# Altium PCB Stm8_PCB.PcbDoc
Units mm, origin at the board's own origin, x right, y up, seen from the top; angles counter-clockwise.
Board outline 64.39 x 38.48 mm, 2 copper layers (Top Layer, Bottom Layer); 55 components, 34 nets, 194 pads, 29 vias.
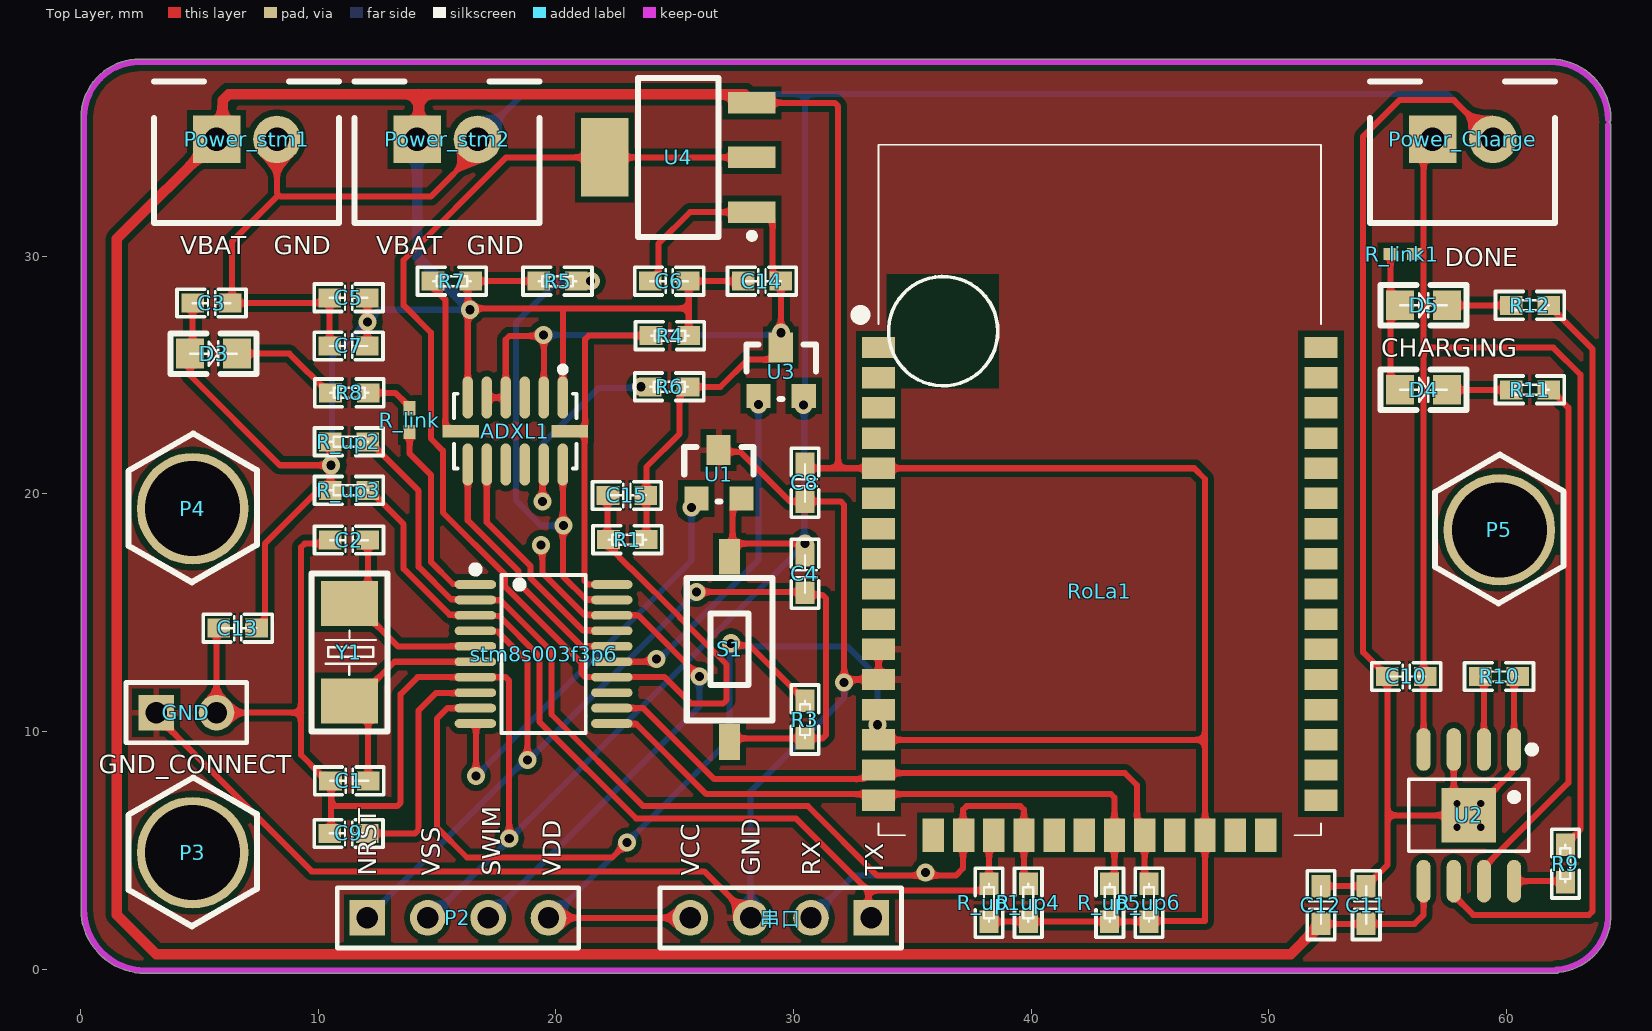
[diagram p0: Top Layer view]
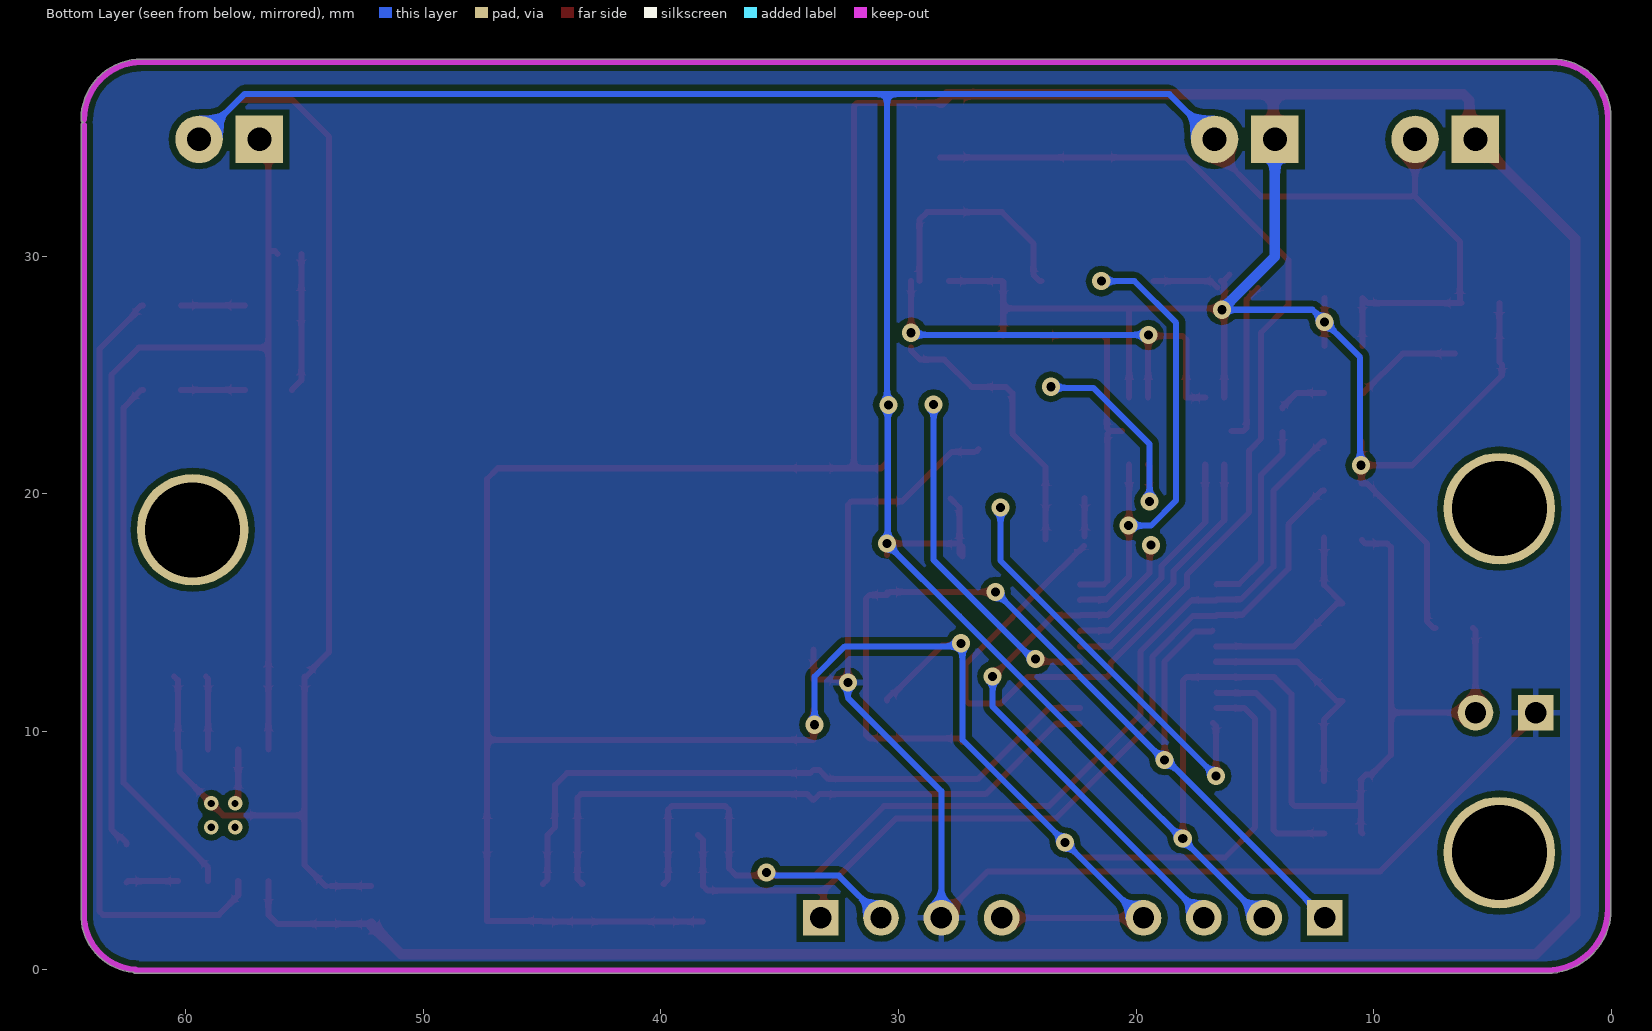
[diagram p1: Bottom Layer view, seen from below]
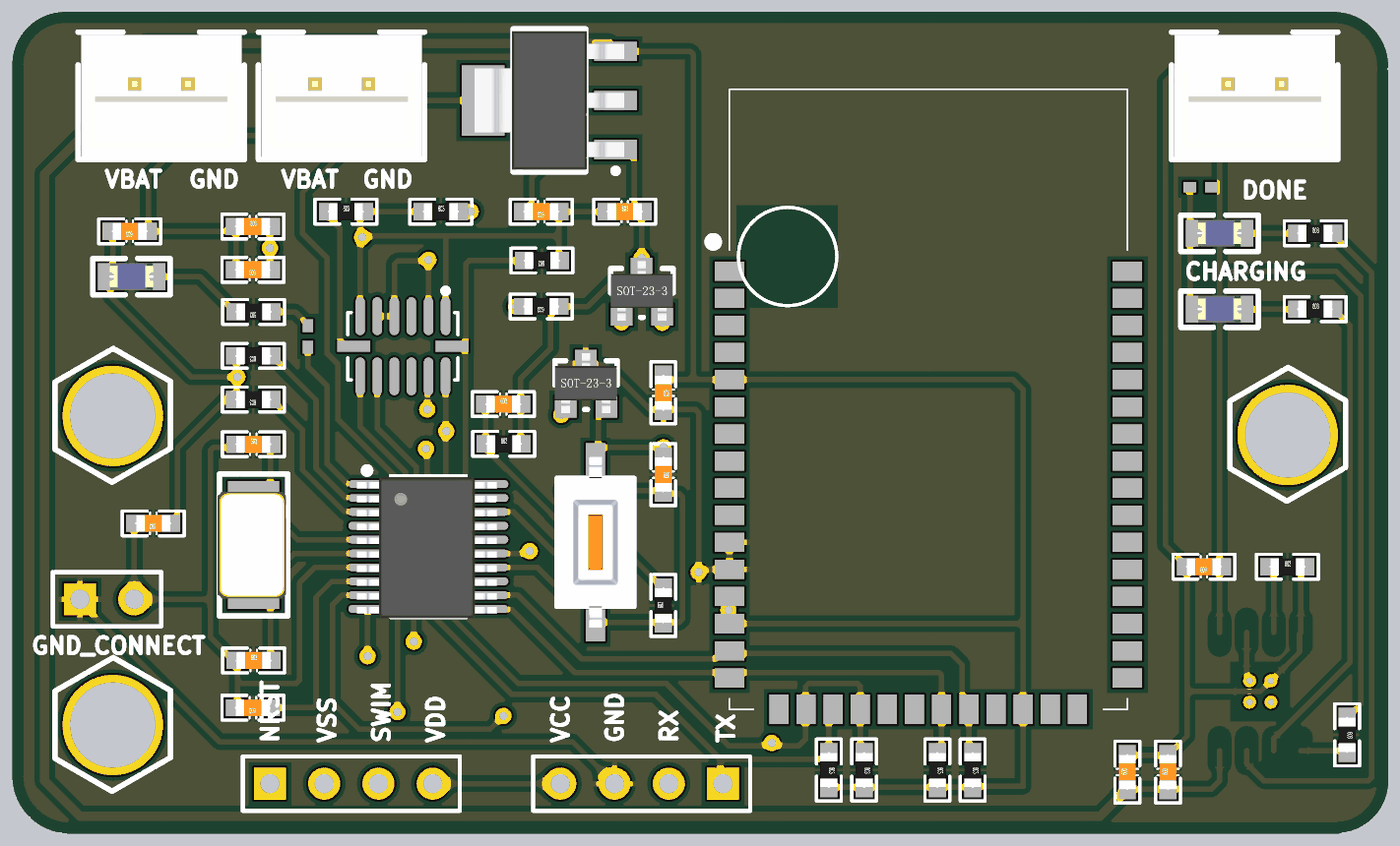
[diagram p2: 3D render of the assembled board from above, using the file's embedded part models]

## Layer stack, top to bottom
Top Solder: solder mask 0.0102, Solder Resist, Dk 3.5
Top Layer: signal copper 0.0356
Dielectric 1: dielectric 0.32, FR-4, Dk 4.8
Bottom Layer: signal copper 0.0356
Bottom Solder: solder mask 0.0102, Solder Resist, Dk 3.5

## Board outline
0.012,2.527 ccw(c2.716,2.527) 2.716,-0.177 62.104,-0.177 ccw(c62.104,-0.049) 62.2,-0.133 ccw(c61.976,2.286) 64.401,2.151 ccw(c64.274,2.158) 64.402,2.158 64.402,2.406 ccw(c64.275,2.406) 64.402,2.406 ccw(c64.275,2.406) 64.402,2.416 64.402,35.517 ccw(c64.274,35.517) 64.305,35.641 ccw(c64.275,35.765) 64.402,35.765 ccw(c64.275,35.765) 64.402,35.765 ccw(c61.855,35.758) 61.849,38.305 ccw(c61.855,35.758) 61.849,38.305 2.481,38.305 ccw(c2.481,35.836) 0.012,35.836

## Design rules (kind name [scope] priority, off if disabled: settings)
Clearance [All] p1: gap=0.254 ignorepadtopadclearanceinfootprint=FALSE except(0: Arc-Hole Track-Hole SMDPad-Hole THPad-Hole Via-Hole Fill-Hole Poly-Hole Region-Hole Text-Hole)
PolygonConnect [All] p1: connectstyle=Relief reliefconductorwidth=0.254 reliefentries=4 polygonreliefangle="90 Angle" airgapwidth=0.254
RoutingVias [All] p1: holewidth=0.711 width=1.27 viastyle="Through Hole" minholewidth=0.711 minwidth=1.27 maxholewidth=0.711 maxwidth=1.27
SolderMaskExpansion [All] p1: expansion=0.102 istentingtop=FALSE
Width [All] p1: maxlimit=0.54 minlimit=0.254 preferedwidth=0.254
30 further rules are at their usual default settings.

## Components (designator, comment, footprint, x,y, rotation, side; value= is the part's Value field where it differs from the comment)
ADXL1 "ADXL345BCCZ" "LGA-14_L5.0-W3.0-P0.80-BL - duplicate" 18.288,22.86 r180 top
C1 "22pf" 0603-C 11.303,7.928 r0 top value=22
C2 "22pf" 0603-C 11.292,18.058 r0 top value=22
C3 "2.2uf" 0603-C 5.504,28.034 r180 top
C4 "0.1uf" 0603-C 30.48,16.637 r270 top value=0.1uF
C5 "2.2uf" 0603-C 11.271,28.257 r0 top
C6 "2.2uf" 0603-C 24.765,28.956 r180 top
C7 "2.2uf" 0603-C 11.271,26.23 r180 top
C8 "2.2uf" 0603-C 30.48,20.469 r270 top
C9 "0.1uf" 0603-C 11.271,5.715 r180 top value=0.1uF
C10 "2.2uf" 0603-C 55.785,12.319 r180 top value=0.1uf
C11 "2.2uf" 0603-C 54.102,2.699 r90 top value=0.1uf
C12 "2.2uf" 0603-C 52.197,2.699 r90 top value=0.1uf
C13 "2.2uf" 0603-C 6.604,14.351 r180 top
C14 "2.2uf" 0603-C 28.67,28.956 r0 top
C15 "2.2uf" 0603-C 22.987,19.939 r0 top value=0.1uf
D3 "LED0" LED-BLUE-0805 5.588,25.908 r0 top
D4 "LED0" LED-BLUE-0805 56.515,24.384 r0 top
D5 "LED0" LED-BLUE-0805 56.515,27.94 r0 top
GND "XH接线座-2P" HDR1X2 3.175,10.795 r0 top
P2 "Header 4" HDR1X4 12.065,2.159 r0 top
P3 "铜柱孔" 铜柱孔 4.712,4.904 r90 top
P4 "铜柱孔" 铜柱孔 4.712,19.382 r90 top
P5 "铜柱孔" 铜柱孔 59.703,18.493 r90 top
Power_Charge "XH接线座-2P" XH-2P 58.166,34.925 r0 top
Power_stm1 "XH接线座-2P" XH-2P 6.985,34.925 r0 top
Power_stm2 "XH接线座-2P" XH-2P 15.427,34.925 r0 top
R1 "1K" 0603-R 23.008,18.077 r0 top value=2K
R3 "10K" 0603-R 30.48,10.507 r90 top
R4 "10K" 0603-R 24.796,26.662 r180 top
R5 "10K" 0603-R 20.066,28.956 r0 top
R6 "0" 0603-R 24.765,24.511 r180 top
R7 "10K" 0603-R 15.621,28.956 r0 top
R8 "1K" 0603-R 11.303,24.257 r180 top
R9 "1K" 0603-R 62.484,4.445 r270 top value=2K
R10 "1K" 0603-R 59.69,12.319 r0 top value=2K
R11 "1K" 0603-R 60.992,24.384 r0 top value=2K
R12 "1K" 0603-R 60.992,27.94 r0 top value=2K
R_link "1K" 0402 13.843,23.106 r90 top value=0
R_link1 "1K" 0402 55.626,30.099 r180 top value=0
R_up1 "10K" 0603-R 38.227,2.794 r270 top
R_up2 "10K" 0603-R 11.289,22.197 r180 top
R_up3 "10K" 0603-R 11.289,20.153 r180 top
R_up4 "10K" 0603-R 39.878,2.794 r270 top
R_up5 "10K" 0603-R 43.307,2.794 r270 top
R_up6 "10K" 0603-R 44.958,2.794 r270 top
RoLa1 "WH-L101-L-P" WH-L101-L-P 32.84,27.511 r0 top
S1 "SW-PB" 按键(贴片) 27.305,13.462 r90 top
stm8s003f3p6 "stm8s003f3p6" TSSOP20 16.62,16.891 r0 top
U1 "A09T" SOT23 25.784,19.796 r0 top
U2 "TC4056" SOP-8_L4.9-W3.9-P1.27-LS6.0-BL-EP 484.98,-424.589 r180 top
U3 "A09T" SOT23 28.4,24.114 r0 top
U4 "AMS1117-3.3" SOT-223 25.146,34.163 r90 top
Y1 "16MHz" "OSC-SMD_L5.0-W3.2 - duplicate" 11.303,13.335 r90 top
串口 "XH接线座-4P" HDR1X4 33.274,2.159 r180 top

## Footprints (in the part's own frame and the unit in brackets; to place one, negate y for a bottom-side part, rotate by r counter-clockwise, add the part's x,y. Pads: shape width x height; smd on the part's side, far side on the other; paste and mask are expansions set on the pad)
0402 [mm] "Chip Capacitor, Body 1.0x0.5mm, IPC High Density"
  rect 0.6x0.5 smd: 1(-0.5,0) 2(0.5,0)
  body extent -0.55,-0.3 0.55,0.3, height 1.3
0603-C [mm]
  rect 0.953x0.8 smd: 1(-0.794,0) 2(0.794,0)
  silkscreen extent -1.45,-0.58 1.45,0.58, body extent -0.8,-0.4 0.8,0.4, height 0.3
0603-R [mm]
  rect 0.953x0.8 smd: 1(-0.794,0) 2(0.794,0)
  silkscreen extent -1.45,-0.58 1.45,0.58, body extent -0.8,-0.4 0.8,0.4, height 0.3
HDR1X2 [mm] "Connector; Header; 2 Position"
  rect 1.5x1.5 hole 0.9: 1(0,0)
  round 1.5 hole 0.9: 2(2.54,0)
  silkscreen extent -1.27,-1.27 3.81,1.27
HDR1X4 [mm] "Connector; Header; 4 Position"
  rect 1.5x1.5 hole 0.9: 1(0,0)
  round 1.5 hole 0.9: 2(2.54,0) 3(5.08,0) 4(7.62,0)
  silkscreen extent -1.27,-1.27 8.89,1.27
LED-BLUE-0805 [mm]
  rect 1.185x1.25 smd: 1(-0.988,0) 2(0.988,0)
  silkscreen extent -1.81,-0.85 1.81,0.85, body extent -1.01,-0.63 1.01,0.62, height 1.1
"LGA-14_L5.0-W3.0-P0.80-BL - duplicate" [mm]
  oval 0.448x1.769 smd: 1(-2,-1.197) 2(-1.2,-1.197) 3(-0.4,-1.197) 4(0.4,-1.197) 5(1.2,-1.197) 6(2,-1.197) 8(2,1.622) 9(1.2,1.622) 10(0.4,1.622) 11(-0.4,1.622) 12(-1.2,1.622) 13(-2,1.622)
  rect 1.545x0.522 smd: 7(2.298,0.213) 14(-2.298,0.213)
  silkscreen extent -2.58,-2.51 2.58,1.79
"OSC-SMD_L5.0-W3.2 - duplicate" [mm]
  rect 1.9x2.4 smd: 1(-2.05,0) 2(2.05,0)
  silkscreen extent -3.32,-1.6 3.32,1.6, body extent -2.5,-1.52 2.5,1.68, height 1
SOP-8_L4.9-W3.9-P1.27-LS6.0-BL-EP [mm] "TC4056A"
  oval 0.6x1.8 smd: 1(424.655,-433.838) 2(425.925,-433.838) 3(427.195,-433.838) 4(428.465,-433.838) 5(428.465,-428.293) 6(427.195,-428.293) 7(425.925,-428.293) 8(424.655,-428.293)
  rect 2.29x2.29 smd: 9(426.56,-431.066)
  silkscreen extent 423.76,-433.99 429.09,-429.54, body extent 424.05,-434.09 429.07,-428.05, height 1.6
SOT23 [mil]
  rect 40x40 smd: 1(4.88,0.63) 2(79.88,0.63)
  rect 40x50 smd: 3(41.88,80.63)
  silkscreen extent -15,-4 100,86, body extent -15,-11 99,99, height 47
SOT-223 [mm]
  rect 0.9x2 smd: 1(-2.3,-3.1) 2(0,-3.1) 3(2.3,-3.1)
  rect 3.3x2 smd: 2(0,3.1)
  silkscreen extent -3.42,-3.22 3.35,1.7, body extent -3.25,-3.5 3.25,3.5, height 1.64
TSSOP20 [mil]
  oval 68.58x14.33 smd: 1(-0.39,-27.64) 2(-0.39,-53.23) 3(-0.39,-78.82) 4(-0.39,-104.41) 5(-0.39,-130) 6(-0.39,-155.59) 7(-0.39,-181.18) 8(-0.39,-206.77) 9(-0.39,-232.36) 10(-0.39,-257.95) 11(225.67,-257.95) 12(225.67,-232.36) 13(225.67,-206.77) 14(225.67,-181.18) 15(225.67,-155.59) 16(225.67,-130) 17(225.67,-104.41) 18(225.67,-78.82) 19(225.67,-53.23) 20(225.67,-27.64)
  silkscreen extent -6,-274 182,3, body extent -19,-275 239,-15, height 47
WH-L101-L-P [mm]
  rect 1.4x0.9 smd: 1(0.737,-1.349) 2(0.737,-2.619) 3(0.737,-3.889) 4(0.737,-5.159) 5(0.737,-6.429) 6(0.737,-7.699) 7(0.737,-8.969) 8(0.737,-10.239) 9(0.737,-11.509) 10(0.737,-12.779) 11(0.737,-14.049) 12(0.737,-15.319) 13(0.737,-16.589) 14(0.737,-17.859) 15(0.737,-19.129) 16(0.737,-20.399) 29(19.357,-20.399) 30(19.357,-19.129) 31(19.357,-17.859) 32(19.357,-16.589) 33(19.357,-15.319) 34(19.357,-14.049) 35(19.357,-12.779) 36(19.357,-11.509) 37(19.357,-10.239) 38(19.357,-8.969) 39(19.357,-7.699) 40(19.357,-6.429) 41(19.357,-5.159) 42(19.357,-3.889) 43(19.357,-2.619) 44(19.357,-1.349)
  rect 0.9x1.4 smd: 17(3.047,-21.869) 18(4.317,-21.869) 19(5.587,-21.869) 20(6.857,-21.869) 21(8.127,-21.869) 22(9.397,-21.869) 23(10.667,-21.869) 24(11.937,-21.869) 25(13.207,-21.869) 26(14.477,-21.869) 27(15.757,-21.869) 28(17.027,-21.869)
  Top Layer pour cut-out: 1.067,1.753 5.817,1.753 5.817,-3.073 1.067,-3.073
  silkscreen extent -0.06,-21.87 19.36,7.18
XH-2P [mm]
  rect 2x2 hole 1: 1(-1.27,0)
  round 2 hole 1: 2(1.27,0)
  silkscreen extent -3.9,-3.53 3.88,2.44, body extent -3.75,-3.4 3.75,2.3, height 7
按键(贴片) [mm]
  rect 1.5x0.9 smd: 1(-3.9,0) 2(3.9,0)
  silkscreen extent -3,-1.8 3,1.8, body extent -4,-1.8 4,1.8, height 2.6
铜柱孔 [mm]
  round 4.7 hole 4: 1(0,0)
  silkscreen extent -3.1,-2.7 3.16,2.7

## Part data
C1 C2 C3 C4 C5 C6 C7 C8 C9 C10 C11 C12 C13 C14 C15: library part Cap, "Capacitor", LatestRevisionDate=17-Jul-2002, LatestRevisionNote="Re-released for DXP Platform.", PackageDescription="Radial Cap, Thru-Hole; 2 Leads; 0.3 in Pin Spacing", PackageReference=RAD-0.3, Published=8-Jun-2000, Publisher="Altium Limited"
D3 D4 D5: "发光二极管", LatestRevisionDate=08-Jul-2005, LatestRevisionNote="Mech Layer 1 removed.", PackageReference=LED-0, Published=8-Jun-2000, Publisher="Altium Limited"
P2: "Header, 4-Pin", LatestRevisionDate=17-Jul-2002, LatestRevisionNote="Re-released for DXP Platform.", Publisher="Altium Limited"
R1 R3 R4 R5 R6 R7 R8 R9 R10 R11 R12 R_link R_link1 R_up1 R_up2 R_up3 R_up4 R_up5 R_up6: library part Res1, "贴片电阻", LatestRevisionDate=17-Jul-2002, LatestRevisionNote="Re-released for DXP Platform.", PackageReference=AXIAL-0.4, Published=8-Jun-2000, Publisher="Altium Limited"
S1: "微动开关", LatestRevisionDate=17-Jul-2002, LatestRevisionNote="Re-released for DXP Platform.", PackageReference=SPST-2, Published=24-Mar-1999, Publisher="Altium Limited"
U2: "TC4056电源模块"
Y1: library part XTAL_1, "Crystal Oscillator", LatestRevisionDate=17-Jul-2002, LatestRevisionNote="Re-released for DXP Platform.", Published=8-Jun-2000, Publisher="Altium Limited"

## Via types
v1: diameter 0.762, hole 0.381, Top Layer to Bottom Layer, 25 vias
v2: diameter 0.61, hole 0.305, Top Layer to Bottom Layer, 4 vias

## Nets (pads, with @x,y where several pads share a name; then routed paths per layer and width w, separated by ;. In a path a pad name is that pad's centre, name@x,y a point inside that pad or via, vN(x,y) a via of type N, cw(c..) or ccw(c..) an arc to the next point about the centre after c; other vN are vias at no path point)
ADC1: C15.1 R1.1 stm8s003f3p6.14 U4.2 | length 53.8
  Top Layer w0.254: R1.1@22.163,18.208 C15.1@22.163,19.827 ; R1.1@22.193,17.812 23.114,16.891 23.135,16.891 25.226,14.8 25.226,14.779 27.178,12.827 27.178,11.325 27.029,11.176 25.691,11.176 24.578,12.289 21.231,12.289 21.082,12.438 21.082,12.873 17.862,16.093 17.862,16.598 15.24,19.221 15.24,21.826 14.732,22.334 14.732,26.797 13.589,27.94 13.589,29.845 17.907,34.163 22.046,34.163 U4.2@28.246,34.163
CS: ADXL1.7 R7.1 | length 6.8
  Top Layer w0.254: R7.1@14.859,28.664 15.345,28.178 15.345,22.782 15.479,22.647 ADXL1.7
GND: C8.2 GND.1 RoLa1.11 RoLa1.12 U1.3 串口.3 | length 56.4
  Top Layer w0.254: GND.1@3.683,10.16 9.723,4.12 26.233,4.12 串口.3 ; U1.3@26.625,21.892 U1.3@26.705,21.812 ; U1.3@26.828,21.773 U1.3@26.848,21.773 ; 27.554,21.773 U1.3@26.848,21.773 ; RoLa1.11 RoLa1.12 32.28,12.192 32.131,12.341 32.131,19.536 31.982,19.685 30.489,19.685 C8.2 30.471,19.685 29.845,19.685 27.757,21.773 U1.3@26.848,21.773
  Bottom Layer w0.254: 串口.3 28.194,7.493 32.131,11.43 v1(32.131,12.065)
GND_A: ADXL1.2 ADXL1.4 ADXL1.5 C6.2 C14.2 C15.2 R1.2 R6.1 U3.3 U4.1 | length 41.5
  Top Layer w0.254: ADXL1.5 ADXL1.4 17.888,26.499 18.037,26.648 19.488,26.648 ADXL1.2 ; R1.2 23.802,19.939 23.802,21.135 25.209,22.543 25.209,24.238 25.483,24.511 R6.1 26.924,24.511 28.067,25.654 29.083,25.654 29.464,26.035 U3.3 ; C6.2 24.047,28.956 24.32,29.229 24.32,30.543 25.64,31.863 U4.1 28.796,31.863 29.119,31.54 C14.2@29.119,28.956 ; C14.2 v1(29.465,26.784) v1(29.465,26.784)
  Bottom Layer w0.254: v1(19.481,26.693) 29.487,26.693 v1@29.539,26.745
HOST_WAKE: R_up6.1 RoLa1.15 RoLa1.24 stm8s003f3p6.12 | length 28.1
  Top Layer w0.254: stm8s003f3p6.12 23.682,10.989 26.67,8.001 32.946,8.001 33.327,8.382 RoLa1.15 33.704,8.255 43.942,8.255 44.454,7.743 44.454,5.965 RoLa1.24 44.777,3.769 R_up6.1
INT1: ADXL1.8 stm8s003f3p6.16 | length 10.9
  Top Layer w0.254: ADXL1.8 16.288,18.891 18.415,16.764 18.415,16.258 21.084,13.589 stm8s003f3p6.16
INT2: ADXL1.9 stm8s003f3p6.17 | length 9.9
  Top Layer w0.254: ADXL1.9 17.088,18.809 18.923,16.974 18.923,16.469 21.131,14.26 22.331,14.26 stm8s003f3p6.17
LED: D3.2 R8.2 | length 4.6
  Top Layer w0.254: D3.2 8.782,25.908 10.433,24.257 R8.2
NetADXL1_12: ADXL1.12 R6.2 | length 9.2
  Top Layer w0.254: v1(19.431,19.685) 19.431,21.181 ADXL1.12
  Bottom Layer w0.254: v1(19.431,19.685) 19.431,22.098 21.799,24.466 v1@23.616,24.466
  other v1: 23.585,24.511
NetD4_1: D4.1 D5.1 R_link1.2 | length 5.9
  Top Layer w0.254: R_link1.2 55.126,24.786 D4.1
NetD4_2: D4.2 R11.1 | length 2.7
  Top Layer w0.254: D4.2 R11.1
NetD5_2: D5.2 R12.1 | length 2.7
  Top Layer w0.254: D5.2 R12.1
NetR8_1: R8.1 R_link.2 | length 2
  Top Layer w0.254: R8.1 13.242,24.257 13.843,23.656 R_link.2
NetR9_2: R9.2 U2.8 | length 2.2
  Top Layer w0.254: U2.8 62.431,3.704 R9.2
NetR10_1: R10.1 U2.2 | length 3.1
  Top Layer w0.254: U2.2 59.055,12.224 R10.1@59.15,12.319
NetR11_2: R11.2 U2.7 | length 22.5
  Top Layer w0.254: U2.7 59.055,4.283 62.611,7.839 62.611,23.635 61.862,24.384 R11.2
NetR12_2: R12.2 U2.6 | length 33.2
  Top Layer w0.254: U2.6 57.785,3.104 58.603,2.286 63.478,2.286 63.627,2.435 63.627,26.098 62.135,27.591 62.135,27.667 61.862,27.94 R12.2
NRST: C4.2 P2.1 R3.1 S1.1 stm8s003f3p6.4 | length 41.8
  Top Layer w0.254: P2.1@12.065,1.955 P2.1@12.142,2.032 ; stm8s003f3p6.4@16.785,14.248 16.815,14.218 17.536,14.218 18.796,12.958 v1(18.796,8.81) ; v1(25.908,15.875) 30.349,15.875 30.43,15.794 C4.2 ; S1.1 27.457,9.714 31.22,9.714 31.369,9.862 31.369,15.599 31.22,15.748 C4.2@30.48,15.748
  Bottom Layer w0.254: P2.1 15.367,5.461 18.716,8.81 v1(18.796,8.81) ; v1@18.828,8.795 v1(25.908,15.875)
PA1: C2.2 stm8s003f3p6.5 Y1.2 | length 9.2
  Top Layer w0.254: C2.2@12.086,18.161 12.086,16.168 Y1.2 11.553,15.385 13.349,13.589 stm8s003f3p6.5@16.637,13.589
PA2: C1.2 stm8s003f3p6.6 Y1.1 | length 9.7
  Top Layer w0.254: C1.2 12.097,10.491 Y1.1 11.553,11.285 13.207,12.939 stm8s003f3p6.6@16.637,12.939
PA3: stm8s003f3p6.10 U1.1 | length 17.4
  Top Layer w0.254: v1(16.637,8.128) 16.637,10.239 16.639,10.241 16.638,10.243 stm8s003f3p6.10@16.764,10.369
  Bottom Layer w0.254: v1(16.637,8.128) 25.705,17.196 v1(25.705,19.434)
PB5: R_up5.1 RoLa1.16 RoLa1.23 stm8s003f3p6.11 | length 26.4
  Top Layer w0.254: stm8s003f3p6.11 22.373,10.318 23.381,10.318 26.333,7.366 33.323,7.366 RoLa1.16 33.831,7.366 43.358,7.366 43.507,7.217 RoLa1.23 43.507,3.788 R_up5.1
PC3: stm8s003f3p6.13
PC5: stm8s003f3p6.15 U3.1 | length 14.5
  Top Layer w0.254: stm8s003f3p6.15 24.113,12.939 v1(24.225,13.051)
  Bottom Layer w0.254: v1(24.225,13.051) 24.354,13.051 28.522,17.219 v1(28.522,23.766)
PD2: ADXL1.13 R5.2 stm8s003f3p6.19 | length 21
  Top Layer w0.254: ADXL1.13 20.288,16.54 21.268,15.56 22.331,15.56 stm8s003f3p6.19
  Bottom Layer w0.254: v1(20.32,18.669) 19.369,18.669 18.31,19.729 18.31,27.2 20.066,28.956 v1(21.463,28.956)
PD3: ADXL1.14 R4.2 stm8s003f3p6.20 | length 14.8
  Top Layer w0.254: ADXL1.14 ADXL1.14@21.075,22.647 ; stm8s003f3p6.20 21.358,16.189 21.209,16.338 21.209,22.513 ADXL1.14@21.075,22.647 ; R4.2 21.38,26.662 21.231,26.513 21.231,22.782 21.097,22.647 ADXL1.14@21.075,22.647
PD4: R_link.1 stm8s003f3p6.1 | length 8.1
  Top Layer w0.254: R_link.1 13.843,21.694 14.732,20.805 14.732,17.145 15.667,16.21 16.589,16.21 stm8s003f3p6.1
PD5: R_up2.1 R_up4.1 RoLa1.18 RoLa1.20 stm8s003f3p6.2 串口.2 | length 50.2
  Top Layer w0.254: R_up2.1 12.159,22.197 12.432,21.924 14.224,20.132 14.224,16.935 15.599,15.56 16.589,15.56 16.631,15.518 17.673,15.518 19.812,13.379 19.812,10.719 23.673,6.858 30.607,6.858 33.528,3.937 35.56,3.937 35.59,3.967 35.795,3.967 35.824,3.937 36.83,3.937 37.132,4.239 37.132,5.642 37.132,6.709 37.281,6.858 39.548,6.858 39.697,6.709 RoLa1.20 39.697,3.769 R_up4.1
  Bottom Layer w0.254: 串口.2 32.512,3.937 35.157,3.937 35.187,3.967 35.463,3.967 v1(35.56,4.064)
PD6: R_up1.1 R_up3.1 RoLa1.19 stm8s003f3p6.3 串口.1 | length 39.3
  Top Layer w0.254: R_up3.1 12.159,20.153 12.432,19.88 13.589,18.723 13.589,16.851 15.53,14.91 16.589,14.91 16.631,14.868 17.604,14.868 19.304,13.168 19.304,10.414 23.368,6.35 30.099,6.35 33.147,3.302 ; 串口.1 33.147,2.286 33.147,3.302 ; RoLa1.19 38.227,5.442 38.227,3.512 38.017,3.302 33.147,3.302
SWIM: P2.3 stm8s003f3p6.18 | length 23.4
  Top Layer w0.254: v1(19.367,17.843) 19.431,17.78 19.431,16.679 21.2,14.91 22.331,14.91 stm8s003f3p6.18 23.465,14.889 v1(26.035,12.319)
  Bottom Layer w0.254: P2.3 26.035,11.049 v1(26.035,12.319)
VCAP: C9.1 stm8s003f3p6.8 | length 9.9
  Top Layer w0.254: C9.1 14.075,5.715 14.224,5.864 14.224,10.892 14.95,11.618 16.589,11.618 stm8s003f3p6.8
VCC_PV: C10.1 Power_Charge.1 R9.1 R_link1.1 U2.4 | length 53.5
  Top Layer w0.254: R_link1.1 56.249,30.222 56.515,30.222 ; U2.4 56.515,12.319 56.515,26.162 ; 56.515,30.353 56.515,34.544 Power_Charge.1 ; 56.515,30.438 56.515,30.222 ; R9.1 62.484,5.315 62.757,5.588 62.833,5.588 63.119,5.874 63.119,25.019 61.976,26.162 56.515,26.162 ; 56.515,26.162 56.515,30.222
VDD: ADXL1.1 ADXL1.6 C3.2 C5.2 C6.1 C7.1 C8.1 C11.1 C12.1 C13.1 C14.1 D3.1 P2.4 Power_stm1.1 Power_stm2.1 R3.2 R4.1 R5.1 R7.2 R_up1.2 R_up2.2 R_up3.2 R_up4.2 R_up5.2 R_up6.2 RoLa1.5 RoLa1.13 RoLa1.14 RoLa1.26 stm8s003f3p6.9 U2.5 U4.3 串口.4 | length 313.4
  Top Layer w0.254: C3.2 4.71,25.559 4.6,25.449 4.6,24.991 8.382,21.209 v1@10.509,21.209 ; C13.1 7.474,14.351 7.747,14.624 7.747,17.907 10.287,20.447 10.509,20.447 v1@10.509,21.209 ; R_up2.2@10.509,22.197 v1@10.509,21.209 ; v1(10.541,21.209) v1@10.509,21.209 ; C7.1 C5.2 ; R7.2@16.066,29.229 16.339,28.956 R7.2 16.288,28.829 v1@16.288,27.813 ; ADXL1.6 16.288,27.656 v1(16.384,27.752) ; v1@16.353,27.783 16.383,27.813 20.32,27.813 ; R7.2@16.573,28.683 16.847,28.956 R5.1 ; stm8s003f3p6.9 15.434,10.989 14.986,10.541 14.986,5.969 16.256,4.699 22.362,4.699 v1(22.994,5.331) ; P2.4 串口.4 ; ADXL1.1 20.288,27.781 20.32,27.813 ; R4.1@25.734,26.77 cw(c25.52,26.906) R4.1 25.59,27.813 ; v1(27.367,13.716) 27.461,13.622 28.159,13.622 30.131,11.65 30.207,11.65 30.48,11.377 R3.2 ; C14.1 25.621,28.956 25.59,28.925 25.59,27.813 ; U4.3 31.728,36.463 31.877,36.314 31.877,21.082 ; C8.1@30.48,21.334 30.732,21.082 31.877,21.082 ; RoLa1.13 33.577,10.287 RoLa1.14 47.317,9.652 ; R_up1.2 R_up4.2 R_up5.2 R_up6.2 44.99,2.032 47.317,2.032 RoLa1.26 47.317,9.652 ; C12.1 C11.1 56.134,1.905 56.515,2.286 U2.5 ; 20.32,27.813 25.59,27.813 ; 31.877,21.082 RoLa1.5 46.863,21.082 47.317,20.628 47.317,9.652
  Top Layer w0.44: Power_stm2.1 14.224,34.992 14.224,36.83 ; U4.3 28.17,36.463 27.94,36.693 27.94,36.83 14.224,36.83 ; C12.1 52.197,1.829 52.017,1.649 51.941,1.649 50.927,0.635 3.175,0.635 1.524,2.286 1.524,30.734 Power_stm1.1 5.969,35.179 5.969,36.572 6.227,36.83 14.224,36.83
  Bottom Layer w0.254: v1(10.541,21.209) 10.568,21.236 10.568,25.746 12.574,27.752 v1(16.384,27.752) ; P2.4 19.812,2.159 27.305,9.652 v1@27.305,13.589 ; v1@27.273,13.621 v1@27.305,13.589 ; v1@27.273,13.622 v1(27.367,13.716) ; v1(33.528,10.287) 33.528,12.319 32.258,13.589 v1@27.305,13.589
  Bottom Layer w0.44: Power_stm2.1 14.157,29.979 v1(16.384,27.752)
  other v1: 12.066,27.244
VSS: C1.1 C2.1 C3.1 C4.1 C5.1 C7.2 C9.2 C10.2 C11.2 C12.2 C13.2 GND.2 P2.2 Power_Charge.2 Power_stm1.2 Power_stm2.2 R10.2 S1.2 stm8s003f3p6.7 U1.2 U2.1 U2.3 U2.9 U3.2 | length 209.8
  Top Layer w0.254: C13.2 5.715,14.256 GND.2 9.271,10.795 ; C3.1 C3.1@6.374,28.034 ; Power_stm1.2 8.382,34.798 8.382,34.417 8.255,34.29 8.255,32.661 8.404,32.512 14.732,32.512 16.697,34.477 Power_stm2.2 ; 8.329,32.586 6.374,30.631 C3.1@6.374,28.034 ; C9.2 10.541,5.779 10.541,7.007 ; C7.2 C5.1 10.255,28.034 C3.1@6.374,28.034 ; C2.1 10.347,17.907 9.42,17.907 9.271,17.758 9.271,10.795 ; C1.1 10.541,7.896 10.541,7.007 ; C1.1@10.547,7.966 10.312,8.201 10.087,8.201 9.271,9.017 9.271,10.795 ; P2.2 P2.2@14.605,2.261 ; v1@18.034,5.69 18.034,12.14 17.885,12.289 14.177,12.289 13.462,11.574 13.462,7.007 13.313,6.858 10.69,6.858 10.541,7.007 ; S1.2@27.432,17.78 27.432,17.489 S1.2 27.305,17.78 27.437,17.912 v1(30.484,17.912) 30.484,17.435 C4.1 ; S1.2@27.432,17.912 27.432,19.431 U1.2 ; C12.2 C11.2@53.911,3.492 ; C11.2 54.991,4.381 54.991,6.477 ; U2.3 57.785,7.112 v2(57.92,6.977) ; Power_Charge.2 57.785,36.576 55.499,36.576 53.975,35.052 53.975,13.335 54.642,12.668 54.642,12.592 54.915,12.319 C10.2 54.991,6.477 ; R10.2 60.325,12.16 U2.1 60.259,9.183 60.259,8.316 v2(58.92,6.977) U2.9 54.991,6.477
  Bottom Layer w0.254: P2.2 14.732,2.159 18.057,5.484 19.812,7.239 27.432,14.859 v1(30.484,17.912) ; Power_stm2.2 18.602,36.83 30.48,36.83 ; v1(30.425,23.749) 30.45,23.724 v1@30.45,17.877 ; v1@30.48,23.749 30.48,36.83 ; Power_Charge.2 57.531,36.83 30.48,36.83
  other v1: 18.034,5.508
  other v2: 57.92,5.977 58.92,5.977
pads on no net: ADXL1.3 ADXL1.10 ADXL1.11 P3.1 P4.1 P5.1 RoLa1.1 RoLa1.2 RoLa1.3 RoLa1.4 RoLa1.6 RoLa1.7 RoLa1.8 RoLa1.9 RoLa1.10 RoLa1.17 RoLa1.21 RoLa1.22 RoLa1.25 RoLa1.27 RoLa1.28 RoLa1.29 RoLa1.30 RoLa1.31 RoLa1.32 RoLa1.33 RoLa1.34 RoLa1.35 RoLa1.36 RoLa1.37 RoLa1.38 RoLa1.39 RoLa1.40 RoLa1.41 RoLa1.42 RoLa1.43 RoLa1.44

## Polygon pours and split planes (outlines as drawn)
GND on Top Layer "GND_L01_P002" (solid, pour order 2): 0.889,37.465 1.524,38.1 1.905,38.1 2.032,38.227 62.484,38.227 62.738,37.973 62.992,37.973 63.627,37.338 63.754,37.338 63.754,37.211 64.135,36.83 64.135,1.143 63.5,0.508 63.373,0.508 62.853,-0.012 2.171,-0.012 2.032,0.127 1.524,0.127 1.143,0.508 1.016,0.508 1.016,0.635 0.889,0.762 0.762,0.762 0.762,0.889 0.381,1.27 0.381,1.524 0.254,1.651 0.254,1.778 0.127,1.905 0.127,36.703 0.517,37.093 0.525,37.093 0.525,37.355 1.143,37.973 1.651,37.973 1.905,38.227 2.159,38.227
VSS on Top Layer "VSS_L01_P001" (solid, pour order 1): 66.675,34.036
GND on Bottom Layer "GND_L02_P003" (solid, pour order 3): 1.143,37.719 1.651,37.719 2.159,38.227 62.23,38.227 62.484,37.973 62.992,37.973 63.881,37.084 64.008,37.084 64.008,36.703 64.262,36.449 64.262,1.651 64.008,1.397 64.008,1.016 63.246,0.254 62.738,0.254 62.435,-0.049 2.208,-0.049 2.032,0.127 1.524,0.127 1.016,0.635 0.889,0.635 0.889,0.762 0.508,1.143 0.508,1.397 0.254,1.651 0.254,2.413 0.14,2.527 0.14,36.309 0.127,36.322 0.254,36.449 0.254,36.703 0.635,37.084 0.635,37.338 0.762,37.338 1.397,37.973 1.905,37.973 2.159,38.227 2.794,38.227

## Keep-outs
Keep-Out Layer:
  lines w0.254: 62.104,-0.049 2.716,-0.049 cw(c2.716,2.527) 0.14,2.527 0.14,35.836 cw(c2.481,35.836) 2.481,38.178 61.849,38.178 cw(c61.855,35.758) 64.275,35.765 ; 62.104,-0.012 ccw(c61.976,2.286) 64.274,2.158 ; 64.275,2.406 64.274,2.158 ; 64.274,35.517 64.274,2.158

## Silkscreen, mask and mechanical layers (free items; w line width, h text height)
Top Overlay:
  text "VBAT" at 4.191,30.099 h0.76
  text "GND" at 8.128,30.099 h0.76
  text "VBAT" at 12.446,30.099 h0.76
  text "GND" at 16.256,30.099 h0.76
  text "DONE" at 57.404,29.591 h0.76
  text "CHARGING" at 54.737,25.781 h0.76
  text "GND_CONNECT" at 0.762,8.255 h0.76
  text "NRST" at 12.446,3.937 h0.76 r90
  text "VSS" at 15.113,3.937 h0.76 r90
  text "SWIM" at 17.653,3.937 h0.76 r90
  text "VDD" at 20.193,3.937 h0.76 r90
  text "VCC" at 26.035,3.937 h0.76 r90
  text "GND" at 28.575,3.937 h0.76 r90
  text "RX" at 31.115,3.937 h0.76 r90
  text "TX" at 33.782,3.937 h0.76 r90